# Altium PCB YD-CH579M-size.PcbDoc
Units mil, origin at the board's own origin, x right, y up, seen from the top; angles counter-clockwise.
Board outline 2162.03 x 2110.03 mil, 2 copper layers (Top Layer, Bottom Layer), stack 12.8 mil thick; 17 components, 0 nets, 134 pads, 0 vias.
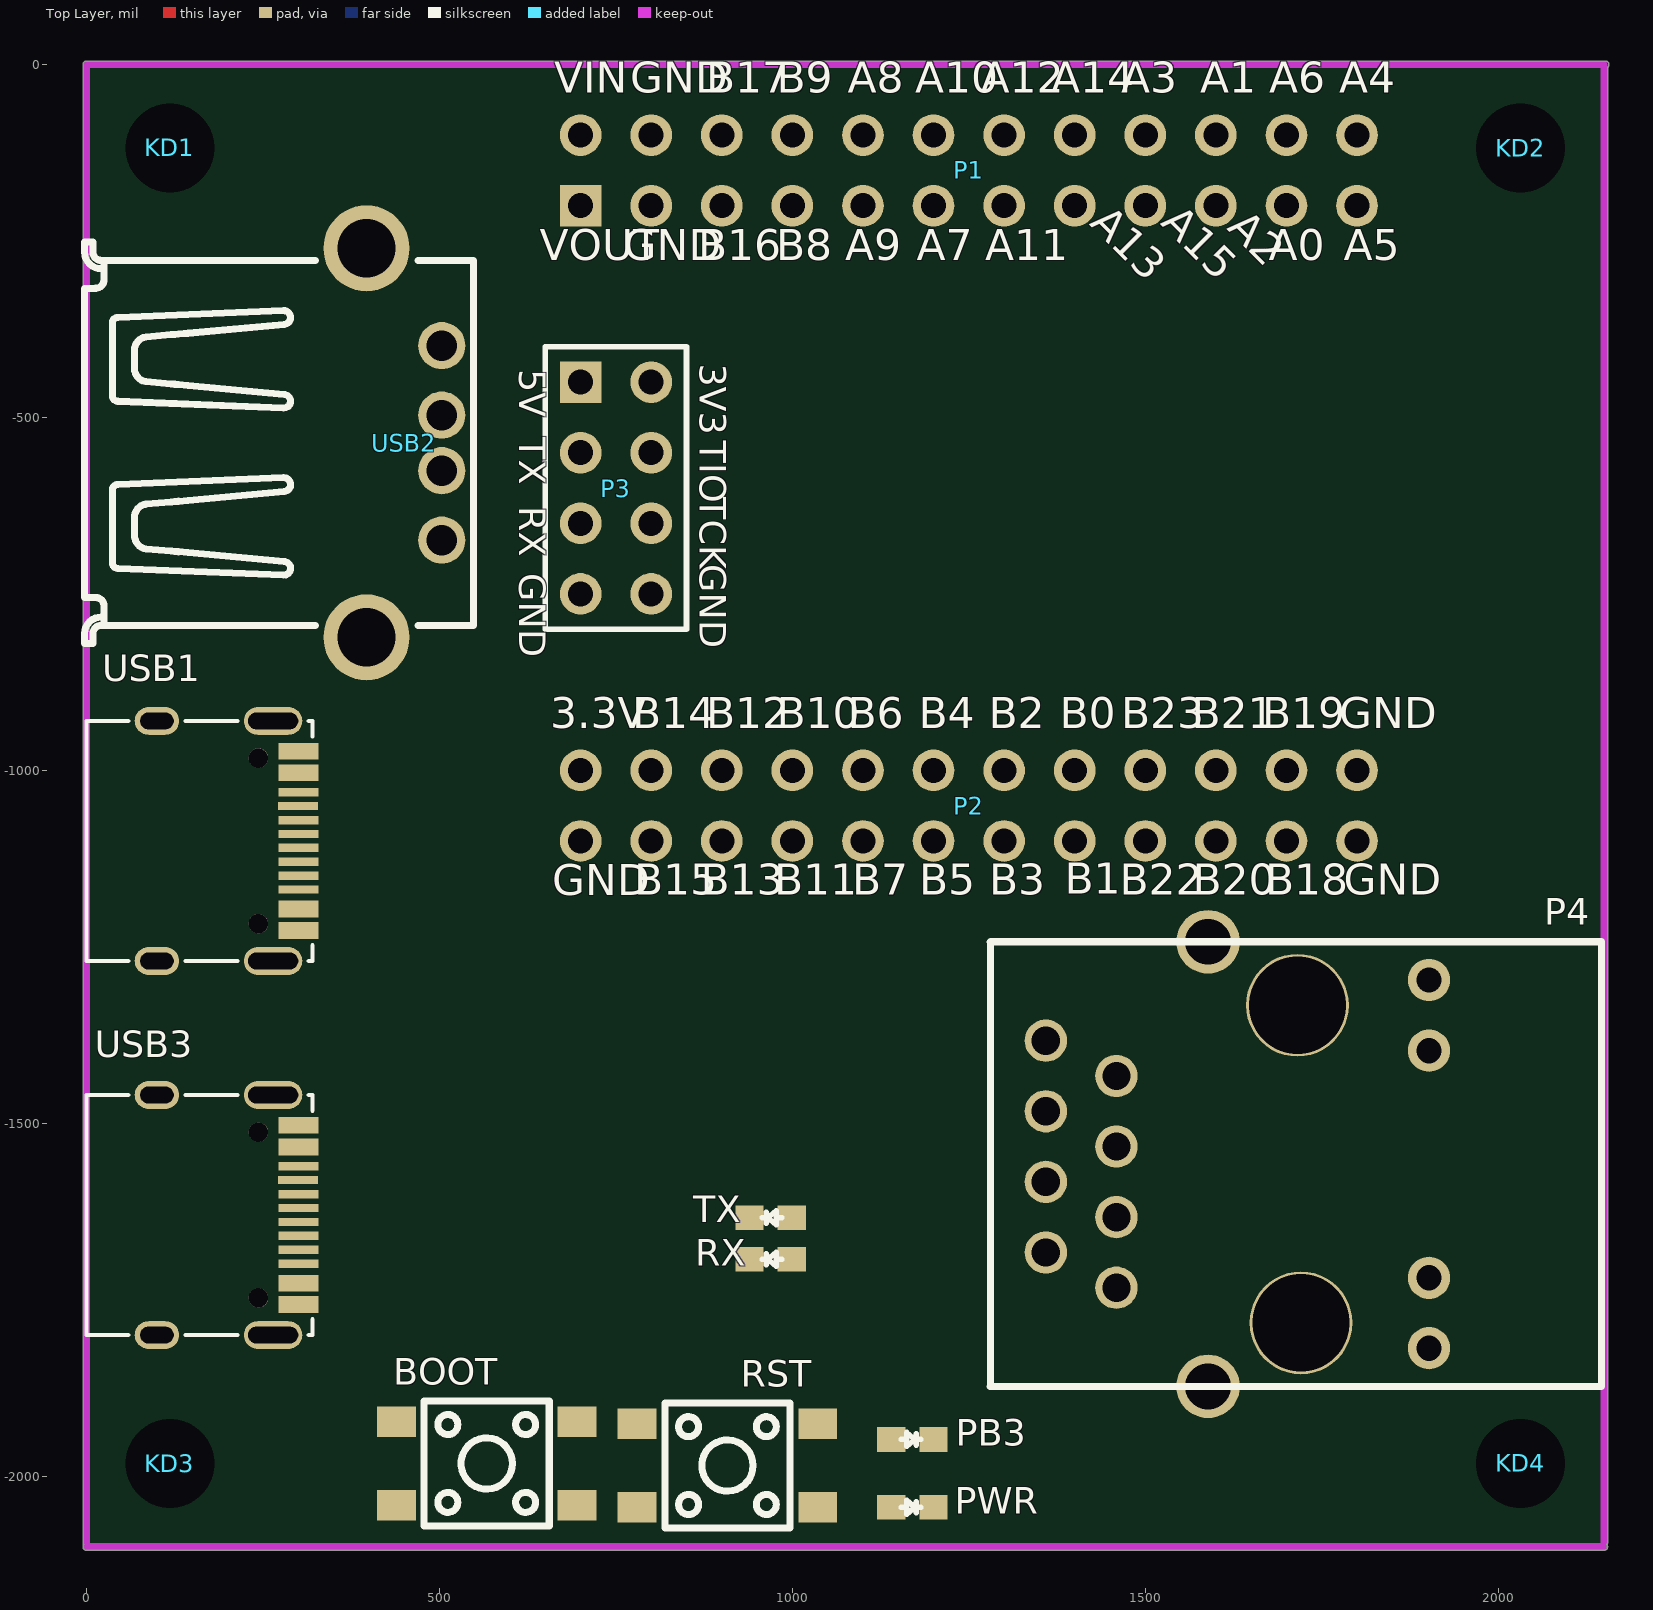
[diagram p0: Top Layer view]
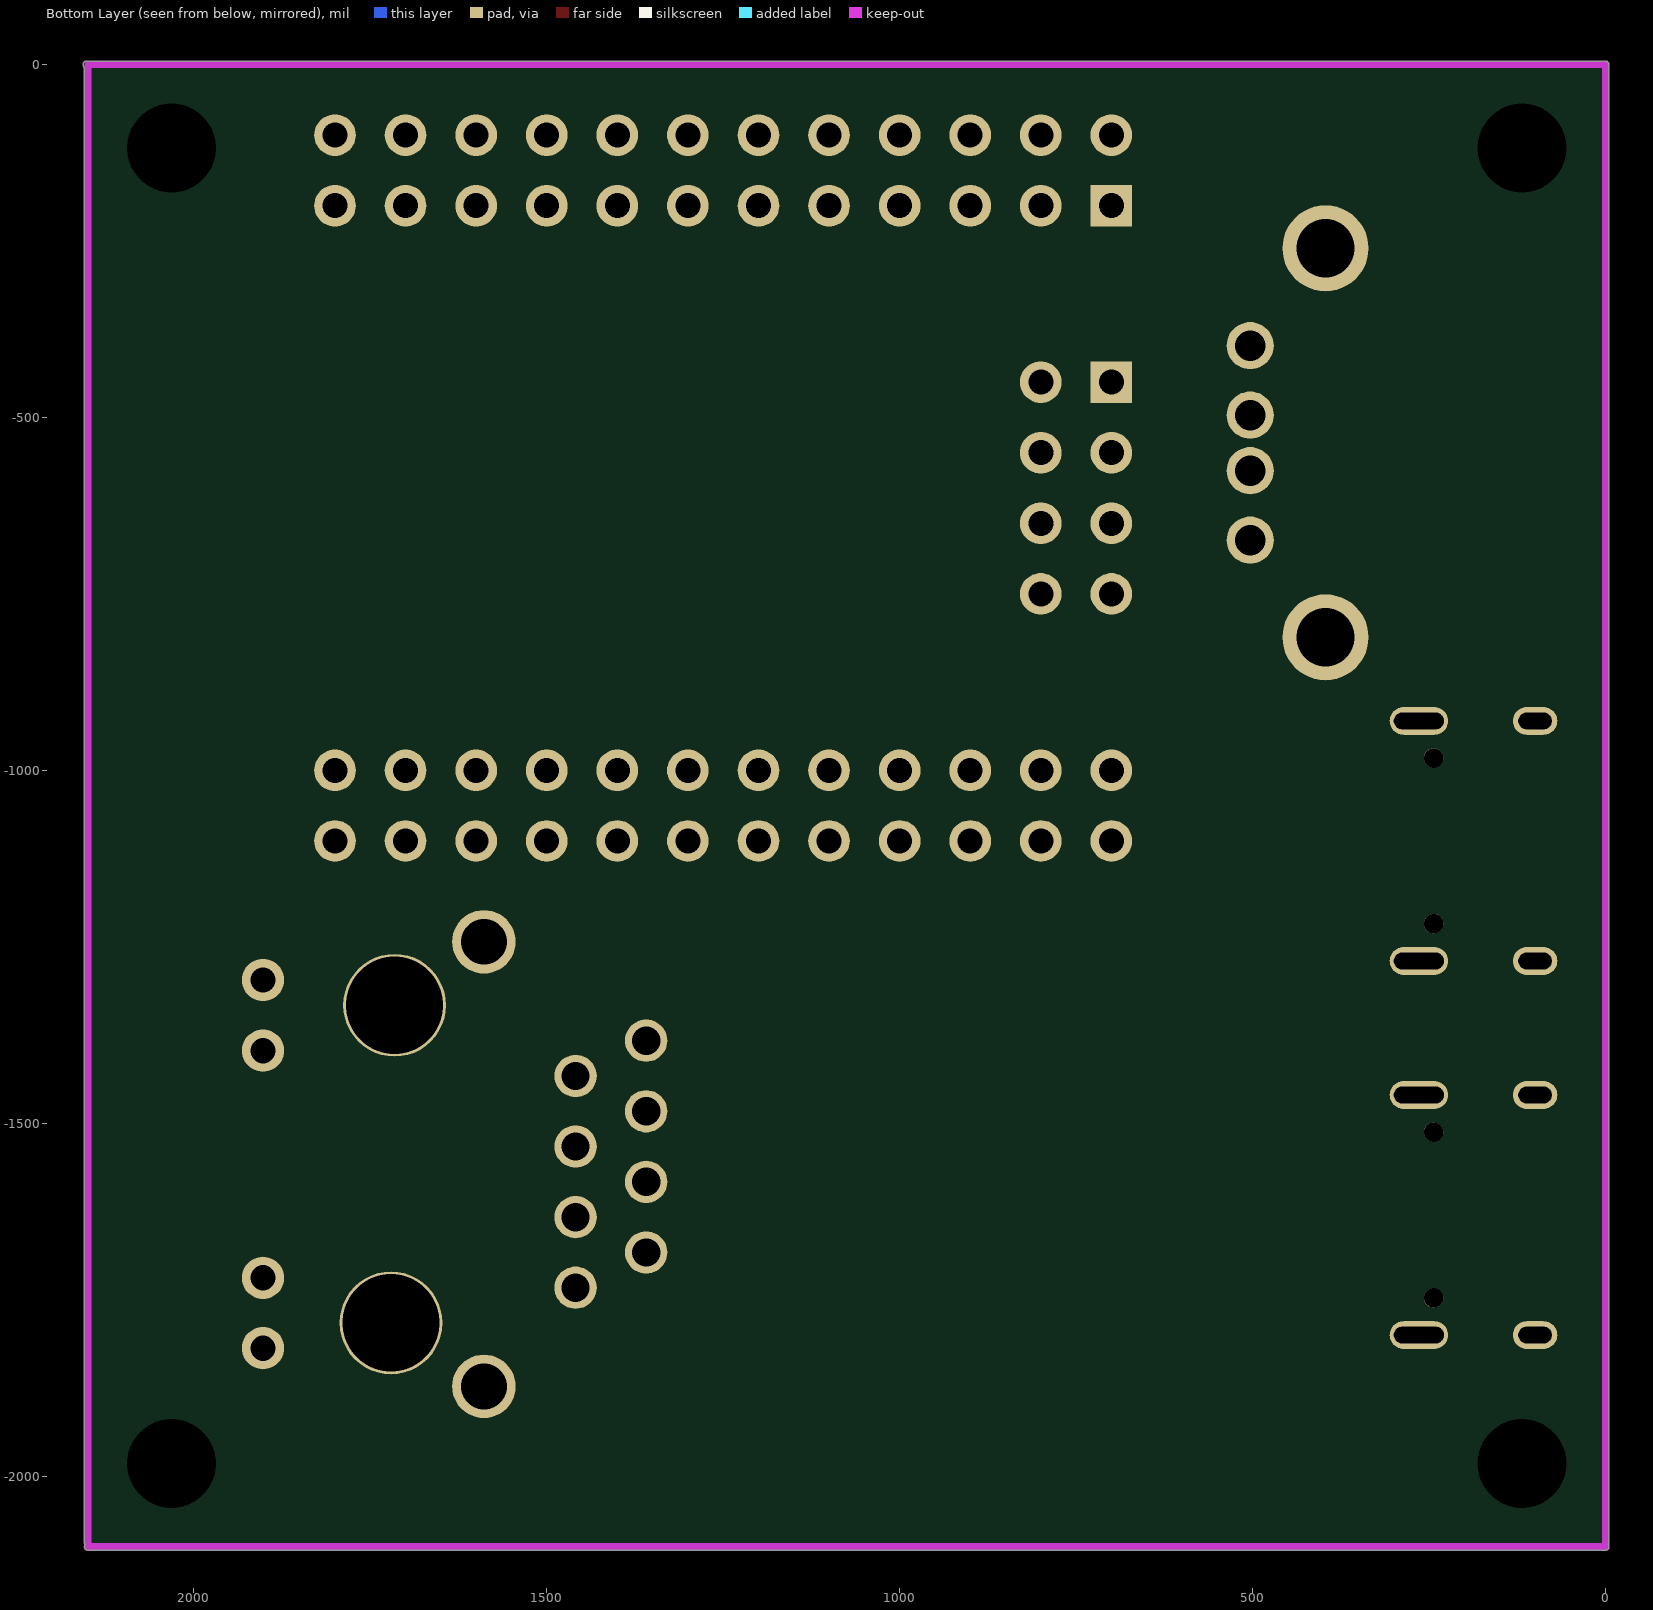
[diagram p1: Bottom Layer view, seen from below]

## Layer stack, top to bottom
Top Solder: solder mask 0.4, Solder Resist, Dk 3.5
Top Layer: signal copper 1.4
Dielectric 1: core 10, FR-4, Dk 4.2
Bottom Layer: signal copper 1.4
Bottom Solder: solder mask 0.4, Solder Resist, Dk 3.5

## Board outline
-5.02,-2094 -5.02,-1200 -5.02,0 cw(c0,0) 0,5.01 2152,5.01 cw(c2152,0) 2157.01,0 cw(c2152,0) 2155.01,-4.01 2155.01,-2094 cw(c2150,-2094) 2154.02,-2097 cw(c2150,-2100) 2155.01,-2100 cw(c2150,-2100) 2150,-2105.02 0,-2105.02 cw(c0,-2100) -4.02,-2097 cw(c0,-2094)

## Design rules (kind name [scope] priority, off if disabled: settings)
Clearance [All] p1: gap=6 ignorepadtopadclearanceinfootprint=TRUE
DiffPairsRouting [All] p1: maxlimit=10 minlimit=10 mostfreqgap=10 substack1={B898CEC4-6A1F-4D15-81D9-7673833C01F6} toplayer_{b898cec4-6a1f-4d15-81d9-7673833c01f6}_minwidth=15 toplayer_{b898cec4-6a1f-4d15-81d9-7673833c01f6}_maxwidth=15 toplayer_{b898cec4-6a1f-4d15-81d9-7673833c01f6}_prefwidth=15 bottomlayer_{b898cec4-6a1f-4d15-81d9-7673833c01f6}_minwidth=15 bottomlayer_{b898cec4-6a1f-4d15-81d9-7673833c01f6}_maxwidth=15 bottomlayer_{b898cec4-6a1f-4d15-81d9-7673833c01f6}_prefwidth=15 toplayer_minwidth=15 toplayer_maxwidth=15 toplayer_prefwidth=15 bottomlayer_minwidth=15 bottomlayer_maxwidth=15 bottomlayer_prefwidth=15 maxuncoupledlength=500
HoleToHoleClearance [All] p1: gap=0 allowstackedmicrovias=TRUE
Length "InNet('FMC_A3') Or InNet('FMC_A1')" [InNet('FMC_A3') Or InNet('FMC_A1')] p1: maxlimit=2088.86 minlimit=2000
MinimumSolderMaskSliver [All] p1: minsoldermaskwidth=0
PolygonConnect [(InPadClass('All Pads'))] p1: connectstyle=Relief reliefconductorwidth=20 reliefentries=4 polygonreliefangle="90 Angle" airgapwidth=10
PolygonConnect PolygonConnect_1 [All] p2: connectstyle=Direct reliefconductorwidth=10 reliefentries=4 polygonreliefangle="90 Angle" airgapwidth=10
RoutingVias [All] p1: holewidth=28 width=50 viastyle="Through Hole" minholewidth=28 minwidth=50 maxholewidth=28 maxwidth=50
SilkToSilkClearance [All] p1: silktosilkclearance=0
SilkToSolderMaskClearance [IsPad] p1: minsilkscreentomaskgap=0 clearancetoexposedcopper=TRUE
SolderMaskExpansion [All] p1: expansion=4 istentingtop=FALSE
Width [All] p1: maxlimit=100 minlimit=7 preferedwidth=10 substack1={B898CEC4-6A1F-4D15-81D9-7673833C01F6}
25 further rules are at their usual default settings.

## Classes and differential pairs
component class CH579M: BOOT KD1 KD2 KD3 KD4 P1 P2 P3 P4 PB3 PWR RST USB1 USB2 USB3

## Components (designator, comment, footprint, x,y, rotation, side; value= is the part's Value field where it differs from the comment)
BOOT "4.5x4.5x3.8贴片" SW-SMD_4P-L4.5-W4.5-P3.00-LS6.8 567,-1982 r180 top
KD1 "KONG" kong 118.11,-118.11 r0 top
KD2 "KONG" kong 2031.89,-118.11 r0 top
KD3 "KONG" kong 118.11,-1981.89 r0 top
KD4 "KONG" kong 2031.89,-1981.89 r0 top
P1 "Header 12X2" HDR2X12#1 700,-200 r0 top locked
P2 "Header 12X2" HDR2X12#2 700,-1100 r0 top locked
P3 "Header 4X2" HDR2X4 700,-450 r270 top locked
P4 "HR911105A" RJ45A 1459.09,-1733 r90 top locked
PB3 "BLUE" LED0603 1170,-1948 r0 top
PWR "RED" LED0603 1170,-2044 r0 top
RST "4.5x4.5x3.8贴片" SW-SMD_4P-L4.5-W4.5-P3.00-LS6.8 908,-1985 r180 top
RX "BLUE" LED0603 969.06,-1692.54 r180 top
TX "GREEN" LED0603 969.06,-1634 r180 top
USB1 "TYPEC-304-BCP16" USB-C-SMD_TYPEC-304-BCP16 200,-1100 r270 top
USB2 "JTJ-USB-AF-08" USB-A-TH__USB-AF-90 450,-536 r270 top
USB3 "TYPEC-304-BCP16" USB-C-SMD_TYPEC-304-BCP16 200,-1630 r270 top

## Footprints (in the part's own frame and the unit in brackets; to place one, negate y for a bottom-side part, rotate by r counter-clockwise, add the part's x,y. Pads: shape width x height; smd on the part's side, far side on the other; paste and mask are expansions set on the pad)
HDR2X4 [mm] "Connector; Header; 4x2 Position"
  rect 1.5x1.5 hole 0.9: 1(0,0)
  round 1.5 hole 0.9: 2(0,2.54) 3(2.54,0) 4(2.54,2.54) 5(5.08,0) 6(5.08,2.54) 7(7.62,0) 8(7.62,2.54)
  silkscreen extent -1.27,-1.27 8.89,3.81
HDR2X12#1 [mm] "Connector; Header; 12x2 Position"
  rect 1.5x1.5 hole 0.9: 1(0,0)
  round 1.5 hole 0.9: 2(0,2.54) 3(2.54,0) 4(2.54,2.54) 5(5.08,0) 6(5.08,2.54) 7(7.62,0) 8(7.62,2.54) 9(10.16,0) 10(10.16,2.54) 11(12.7,0) 12(12.7,2.54) 13(15.24,0) 14(15.24,2.54) 15(17.78,0) 16(17.78,2.54) 17(20.32,0) 18(20.32,2.54) 19(22.86,0) 20(22.86,2.54) 21(25.4,0) 22(25.4,2.54) 23(27.94,0) 24(27.94,2.54)
HDR2X12#2 [mm] "Connector; Header; 12x2 Position"
  round 1.5 hole 0.9: 1(0,0) 2(0,2.54) 3(2.54,0) 4(2.54,2.54) 5(5.08,0) 6(5.08,2.54) 7(7.62,0) 8(7.62,2.54) 9(10.16,0) 10(10.16,2.54) 11(12.7,0) 12(12.7,2.54) 13(15.24,0) 14(15.24,2.54) 15(17.78,0) 16(17.78,2.54) 17(20.32,0) 18(20.32,2.54) 19(22.86,0) 20(22.86,2.54) 21(25.4,0) 22(25.4,2.54) 23(27.94,0) 24(27.94,2.54)
kong [mm]
  round 0 hole 3.2 mask+3: 1(0,0)
LED0603 [mil]
  rect 40x35 smd: 1(-29.92,0) 2(29.92,0)
  silkscreen extent -16,-10 12,10
RJ45A [mil]
  round 145.67 hole 137.8: 0(-49.8,-261.46) 0(400.2,-256.46)
  round 60 hole 40: 1(0,0) 2(50,100) 3(100,0) 4(150,100) 5(200,0) 6(250,100) 7(300,0) 8(350,100)
  round 60 hole 36: 9(-85.63,-442.91) 10(14,-442.91) 11(335.87,-442.91) 12(436,-442.91)
  round 90 hole 65: 13(490.16,-129.92) 14(-139.76,-129.92)
  silkscreen extent -140,-687 490,179
SW-SMD_4P-L4.5-W4.5-P3.00-LS6.8 [mm]
  rect 1.4x1.1 smd mask+0.051: 1(-3.25,1.5) 2(3.25,1.5) 3(-3.25,-1.5) 4(3.25,-1.5)
  silkscreen extent -2.25,-2.25 2.25,2.25
USB-A-TH__USB-AF-90 [mm]
  round 1.7 hole 1.1: 1(-3.5,1.355) 2(-1,1.355) 3(1,1.355) 4(3.5,1.355)
  round 3.1 hole 2.1: SH1(7,-1.355) SH2(-7,-1.355)
  silkscreen extent -7.22,-11.51 7.22,2.49
USB-C-SMD_TYPEC-304-BCP16 [mm]
  oval 1x2.1 hole 0.6 slot 1.8 at 90 deg: 13(-4.32,1.633) 14(4.32,1.633)
  oval 1x1.6 hole 0.6 slot 1.2 at 90 deg: 15(-4.32,-2.548) 16(4.32,-2.548)
  rect 0.6x1.45 smd: A1B12(-3.225,2.547) A4B9(-2.45,2.547) B1A12(3.22,2.547) B4A9(2.45,2.547)
  rect 0.3x1.45 smd: A5(-1.26,2.532) A6(-0.25,2.547) A7(0.25,2.547) A8(1.25,2.547) B5(1.75,2.547) B6(0.75,2.547) B7(-0.75,2.547) B8(-1.75,2.547)
  round 0.7 hole 0.7 unplated: ""(-2.98,1.102) ""(2.98,1.102)
  silkscreen extent -4.32,-5.08 4.32,3.05, body extent -4.51,-5.15 4.45,2.61, height 3.27

## Part data
BOOT RST: Actuator/Cap Color=黑色, Contact Current=50mA, Insulation Resistance=100MΩ, IP Rating=-, JLCPCB Part Class="Extended Part", LCSC Part Name="轻触开关,4.5*4.5*3.8mm 1000/袋", Manufacturer=BOOMELE(博穆精密), Operating Force="260gf ±50gf", Operating Temperature=-20℃~+80℃, Voltage Rating (DC)=12V, Actuator Orientation=顶部触动, Actuator Style=圆形按钮, Add into BOM=yes, Circuit=单刀单掷, Convert to PCB=yes, Datasheet=https://atta.szlcsc.com/upload/public/pdf/source/20200916/C174049_C7EFE601E72DB861B2B81D6E1A27ADFA.pdf, Device=4.5x4.5x3.8贴片, Manufacturer Part=4.5x4.5x3.8贴片, Mechanical Life=100000, Power Rating=-, Strike Gundam=否, Supplier=LCSC, Supplier Footprint=SMD, Supplier Part=C174049, Switch Diameter=-, Switch Height=3.8mm, Switch Length=4.5mm, Switch Width=4.5mm, Symbol=C174049, Termination Style=J型引脚, Voltage Rating (AC)=-, With Lamp=-
P1 P2: "Header, 12-Pin, Dual row", LatestRevisionDate=17-Jul-2002, LatestRevisionNote="Re-released for DXP Platform.", Publisher="Altium Limited"
P3: "Header, 4-Pin, Dual row", LatestRevisionDate=17-Jul-2002, LatestRevisionNote="Re-released for DXP Platform.", Publisher="Altium Limited"
PB3 PWR: library part LED-RED
RX TX: library part LED2, "Typical RED, GREEN, YELLOW, AMBER GaAs LED", PackageDocument=Feb-2002, LatestRevisionDate=17-Jul-2002, LatestRevisionNote="Re-released for DXP Platform.", PackageReference=3.2X1.6X1.1, Published=8-Jun-2000, Publisher="Altium Limited"
USB1 USB3: BOM_Manufacturer=XUNPU, BOM_Manufacturer Part=TYPEC-304-BCP16, BOM_Supplier=LCSC, BOM_Supplier Part=C720629, Contributor=LCSC, spicePre=U, spiceSymbolName=TYPEC-304-BCP16
USB2: BOM_JLCPCB Part Class="Extended Part", BOM_Manufacturer Part=JTJ-USB-AF-08, BOM_Supplier=LCSC, BOM_Supplier Part=C2345, Contributor=LCSC, spicePre=U, spiceSymbolName=JTJ-USB-AF-08

## Nets (pads, with @x,y where several pads share a name; then routed paths per layer and width w, separated by ;. In a path a pad name is that pad's centre, name@x,y a point inside that pad or via, vN(x,y) a via of type N, cw(c..) or ccw(c..) an arc to the next point about the centre after c; other vN are vias at no path point)
pads on no net: BOOT.1 BOOT.2 BOOT.3 BOOT.4 KD1.1 KD2.1 KD3.1 KD4.1 P1.1 P1.2 P1.3 P1.4 P1.5 P1.6 P1.7 P1.8 P1.9 P1.10 P1.11 P1.12 P1.13 P1.14 P1.15 P1.16 P1.17 P1.18 P1.19 P1.20 P1.21 P1.22 P1.23 P1.24 P2.1 P2.2 P2.3 P2.4 P2.5 P2.6 P2.7 P2.8 P2.9 P2.10 P2.11 P2.12 P2.13 P2.14 P2.15 P2.16 P2.17 P2.18 P2.19 P2.20 P2.21 P2.22 P2.23 P2.24 P3.1 P3.2 P3.3 P3.4 P3.5 P3.6 P3.7 P3.8 P4.0 P4.1 P4.2 P4.3 P4.4 P4.5 P4.6 P4.7 P4.8 P4.9 P4.10 P4.11 P4.12 P4.13 P4.14 PB3.1 PB3.2 PWR.1 PWR.2 RST.1 RST.2 RST.3 RST.4 RX.1 RX.2 TX.1 TX.2 USB1. USB1.13 USB1.14 USB1.15 USB1.16 USB1.A1B12 USB1.A4B9 USB1.A5 USB1.A6 USB1.A7 USB1.A8 USB1.B1A12 USB1.B4A9 USB1.B5 USB1.B6 USB1.B7 USB1.B8 USB2.1 USB2.2 USB2.3 USB2.4 USB2.SH1 USB2.SH2 USB3. USB3.13 USB3.14 USB3.15 USB3.16 USB3.A1B12 USB3.A4B9 USB3.A5 USB3.A6 USB3.A7 USB3.A8 USB3.B1A12 USB3.B4A9 USB3.B5 USB3.B6 USB3.B7 USB3.B8

## Polygon pours and split planes (outlines as drawn)
no net on Top Layer "GND_L01_P000" (solid, shelved, pour order 0): 881,1849.9 881,89.9 -876,89.9 -876,1849.9

## Keep-outs
Keep-Out Layer:
  lines w10: 0,-2100 0,0 2150,0 2150,-1200 2150,-2100 0,-2100

## Silkscreen, mask and mechanical layers (free items; w line width, h text height)
Top Overlay:
  text "VIN" at 663,-55 h75
  text "GND" at 770,-55 h75
  text "B17" at 878,-55 h75
  text "B9" at 977.75,-55 h75
  text "A8" at 1078.75,-55 h75
  text "A10" at 1174,-55 h75
  text "A12" at 1267,-55 h75
  text "A14" at 1367,-55.07 h75
  text "A3" at 1466,-55.07 h75
  text "A1" at 1578,-55 h75
  text "A6" at 1676,-55.07 h75
  text "A4" at 1775,-55 h75
  text "A15" at 1510,-236 h75 r315
  text "A13" at 1409,-237 h75 r315
  text "A2" at 1604,-243 h75 r315
  text "VOUT" at 642,-292 h75
  text "GND" at 761,-292 h75
  text "B16" at 867,-292 h75
  text "B8" at 977,-292 h75
  text "A9" at 1075,-292 h75
  text "A7" at 1176,-292 h75
  text "A11" at 1273,-292.07 h75
  text "A0" at 1675,-292 h75
  text "A5" at 1781,-292.07 h75
  text "3V3" at 856,-424 h65 r270
  text "5V" at 600,-432 h65 r270
  text "TX" at 600,-528 h65 r270
  text "TIO" at 855.94,-533 h65 r270
  text "TCK" at 855.94,-613 h65 r270
  text "RX" at 600,-626 h65 r270
  text "GND" at 855.94,-708 h65 r270
  text "GND" at 600,-721 h65 r270
  text "3.3V" at 657,-955 h75
  text "B14" at 773,-955 h75
  text "B12" at 878,-955.06 h75
  text "B10" at 977.75,-955.06 h75
  text "B6" at 1078.75,-955.06 h75
  text "B4" at 1179,-955 h75
  text "B2" at 1278,-955 h75
  text "B0" at 1379,-955 h75
  text "B23" at 1466,-955.06 h75
  text "B21" at 1566,-955.06 h75
  text "B19" at 1666,-955 h75
  text "GND" at 1775,-955.06 h75
  text "B1" at 1386,-1190 h75
  text "B15" at 776,-1191 h75
  text "B13" at 870,-1191 h75
  text "B11" at 974,-1191 h75
  text "B7" at 1084.75,-1191 h75
  text "B5" at 1180,-1191 h75
  text "B3" at 1279,-1191 h75
  text "B22" at 1464,-1191 h75
  text "B20" at 1567,-1191 h75
  text "B18" at 1670,-1191 h75
  text "GND" at 1781,-1191 h75
  text "GND" at 660,-1192 h75

## Dimensions
0,-2100 to 2150,-2100 on Top Overlay
2150,0 to 2150,-2100 on Top Overlay
118.11,-118.11 to 2031.89,-118.11 on Top Overlay
118.11,-1981.89 to 118.11,-118.11 on Top Overlay
0,0 to 0,-2100 on Top Overlay
0,0 to 2150,0 on Top Overlay